# Altium PCB PCB_V1.PcbDoc
Units mm, origin at the board's own origin, x right, y up, seen from the top; angles counter-clockwise.
Board outline 31.91 x 15.3 mm, 2 copper layers (Top Layer, Bottom Layer), stack 1.58 mm thick; 21 components, 14 nets, 69 pads, 14 vias.
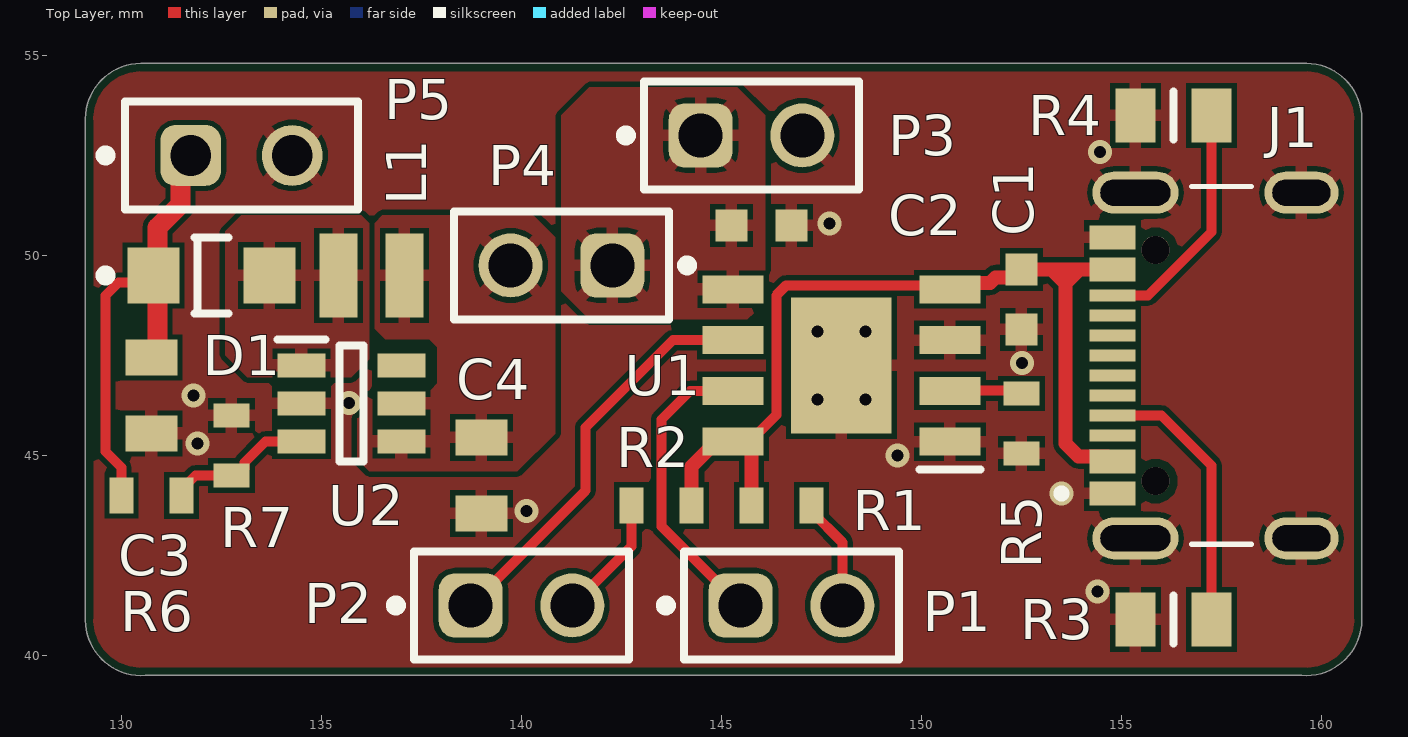
[diagram p0: Top Layer view]
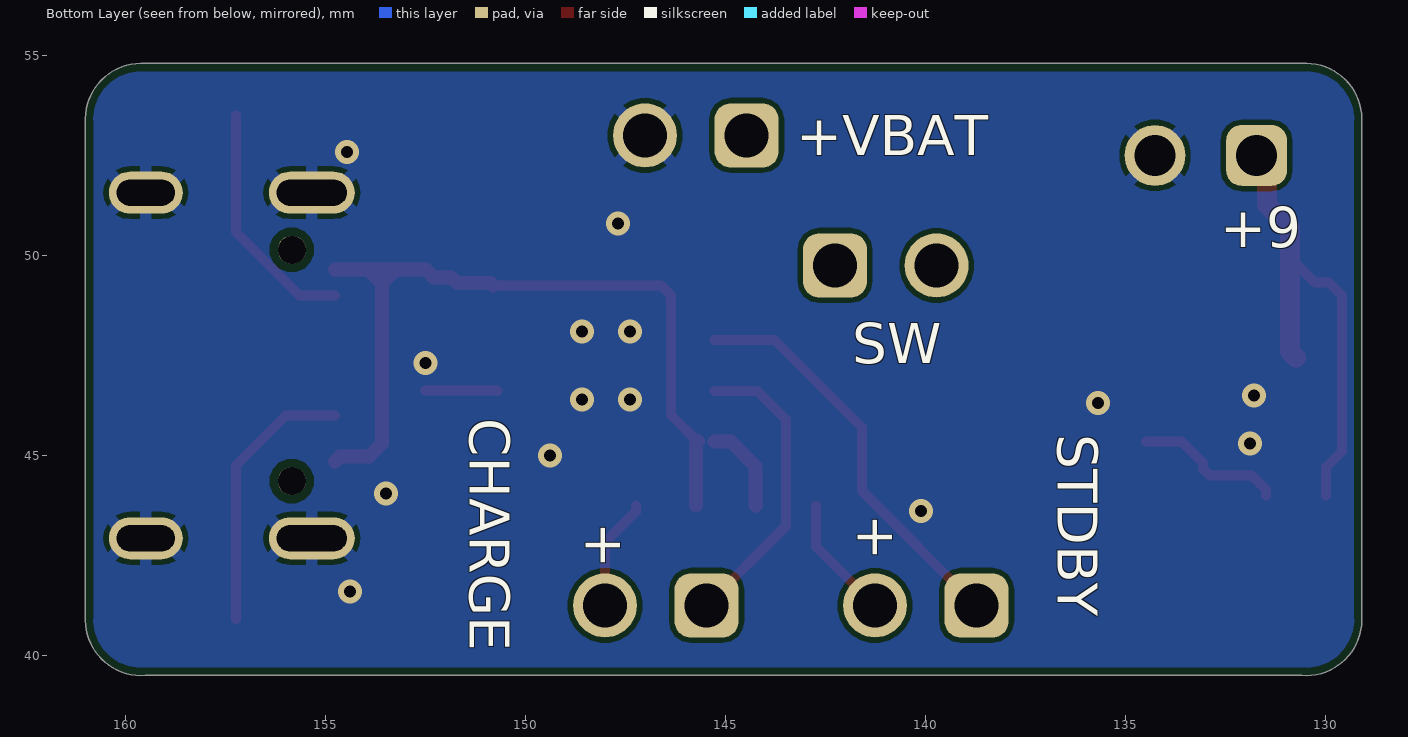
[diagram p1: Bottom Layer view, seen from below]
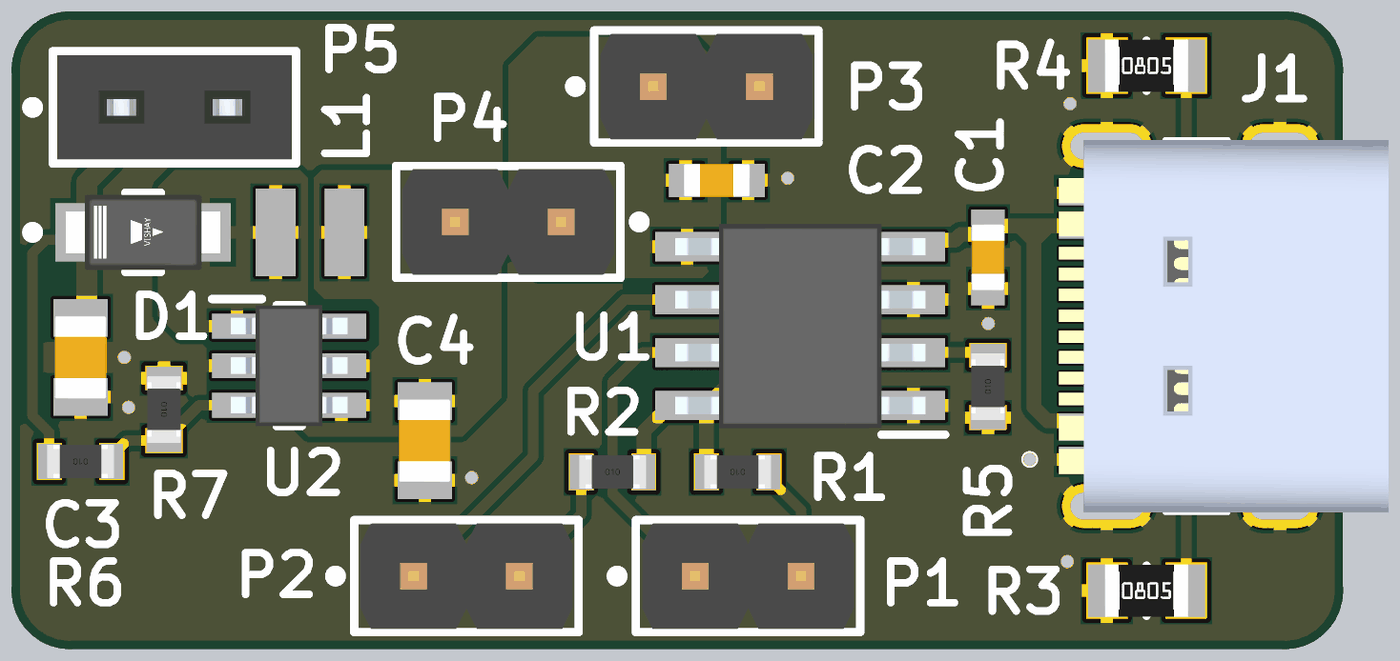
[diagram p2: 3D render of the assembled board from above, using the file's embedded part models]

## Layer stack, top to bottom
Top Solder: solder mask 0.01, Solder Resist, Dk 3.5
Top Layer: signal copper 0.035
Dielectric 1: dielectric 1.51, FR-4, Dk 4.5
Bottom Layer: signal copper 0.035
Bottom Solder: solder mask 0.01, Solder Resist, Dk 3.5

## Board outline
129.1,41 ccw(c130.5,40.9) 130.6,39.5 159.508,39.5 ccw(c159.608,40.9) 161.008,41 161.008,53.3 ccw(c159.608,53.4) 159.508,54.8 130.6,54.8 ccw(c130.5,53.4) 129.1,53.3

## Design rules (kind name [scope] priority, off if disabled: settings)
BoardOutlineClearance [All] p1: gap=0.2 ignorepadtopadclearanceinfootprint=FALSE
Clearance [All] p1: gap=0.127 ignorepadtopadclearanceinfootprint=FALSE except(0.2: Arc-Hole Track-Hole SMDPad-Hole THPad-Hole Via-Hole Fill-Hole Poly-Hole Region-Hole Text-Hole)
ComponentClearance [All] p1: gap=0.127 collisioncheckmode=3 verticalgap=0.127 showdistances=TRUE
DiffPairsRouting [All] p1: maxlimit=0.254 minlimit=0.127 mostfreqgap=0.127 toplayer_minwidth=0.127 toplayer_maxwidth=25.4 toplayer_prefwidth=0.127 bottomlayer_minwidth=0.127 bottomlayer_maxwidth=25.4 bottomlayer_prefwidth=0.127 maxuncoupledlength=12.7
Height [All] p1: minheight=0 maxheight=1816.048 prefheight=12.7
HoleSize [All] p1: absolutevalues=TRUE maxlimit=6.3 minlimit=0.15 maxpercent=80.000 minpercent=20.000
HoleToHoleClearance [All] p1: gap=0.25 allowstackedmicrovias=FALSE
MinimumAnnularRing [All] p1: minimumring=0.075
MinimumSolderMaskSliver [All] p1: minsoldermaskwidth=0
PlaneClearance [All] p1: clearance=0.127
PlaneConnect PlaneConnectPowerPads [InPadClass('PowerPads')] p1: planeconnectstyle=Direct reliefexpansion=0.508 reliefentries=4 reliefconductorwidth=0.254 reliefairgap=0.254
PlaneConnect [All] p2: pad.planeconnectstyle=Relief pad.reliefexpansion=0.3 pad.reliefentries=4 pad.reliefconductorwidth=0.127 pad.reliefairgap=0.127 via.planeconnectstyle=Direct via.reliefexpansion=0.3 via.reliefentries=4 via.reliefconductorwidth=0.127 via.reliefairgap=0.127
PolygonConnect PolygonConnectPowerPads [All vs (InPadClass('PowerPads'))] p1: connectstyle=Direct reliefconductorwidth=0.254 reliefentries=4 polygonreliefangle="90 Angle" airgapwidth=0.254
PolygonConnect [All] p2: thpad.connectstyle=Relief thpad.reliefconductorwidth=0.3 thpad.reliefentries=4 thpad.polygonreliefangle="90 Angle" thpad.airgapwidth=0.127 thpad.conductorbypadedge=TRUE thpad.mindistance=0.381 thpad.enablemindistance=FALSE smdpad.connectstyle=Relief smdpad.reliefconductorwidth=0.3 smdpad.reliefentries=4 smdpad.polygonreliefangle="90 Angle" smdpad.airgapwidth=0.127 smdpad.conductorbypadedge=TRUE smdpad.mindistance=0.381 smdpad.enablemindistance=FALSE via.connectstyle=Direct via.reliefconductorwidth=0.127 via.reliefentries=4 via.polygonreliefangle="90 Angle" via.airgapwidth=0.127
RoutingVias [All] p1: holewidth=0.3 width=0.6 viastyle="Through Hole" minholewidth=0.3 minwidth=0.6 maxholewidth=0.6 maxwidth=6.6
SilkToSilkClearance [All] p1: silktosilkclearance=0
SilkToSolderMaskClearance [IsPad] p1: minsilkscreentomaskgap=0.127 clearancetoexposedcopper=TRUE
SolderMaskExpansion SolderMaskExpansionVia [isVia] p1: expansion=0.102 istentingtop=TRUE
SolderMaskExpansion [All] p2: expansion=0.075 istentingtop=FALSE useseparateexpansions=TRUE expansionbottom=0.075 istentingbottom=FALSE
SupplyNets "Schematic Supply Nets_7" [InNet('+9')] p1: voltage=0.000
SupplyNets "Schematic Supply Nets_6" [InNet('+5')] p2: voltage=0.000
SupplyNets "Schematic Supply Nets_4" [InNet('GND')] p3: voltage=0.000
SupplyNets "Schematic Supply Nets_1" [InNet('VBAT')] p4: voltage=0.000
Width [All] p1: maxlimit=25.4 minlimit=0.127 preferedwidth=0.127 minimp=50.000000 maximp=50.000000 favimp=50.000000
20 further rules are at their usual default settings.

## Components (designator, comment, footprint, x,y, rotation, side; value= is the part's Value field where it differs from the comment)
C1 "Generic Capacitor 10uF 0603" "Wurth 0603 capacitor" 152.5,48.9 r90 top value=10uF
C2 "Generic Capacitor 10uF 0603" "Wurth 0603 capacitor" 146,50.75 r180 top value=10uF
C3 "Generic Capacitor 22uF 0805" "Wurth 0805 capacitor" 130.75,46.5 r90 top value=22uF
C4 "Generic Capacitor 22uF 0805" "Wurth 0805 capacitor" 139,44.5 r90 top value=22uF
D1 "V1FM10-M3/H" FP-V1FM10-M3-H-MFG 132.25,49.5 r180 top
J1 "KH-TYPE-C-16P" KINGHELM_KH-TYPE-C-16P 159.5,47.25 r90 top
L1 "FTC252010S4R7MBCA" "cjiang FTC252010S4R7MBCA" 136.25,49.5 r0 top value=4.7uH
P1 "61300211121" "2x1 2.54mm M" 146.75,41.25 r0 top
P2 "61300211121" "2x1 2.54mm M" 140,41.25 r0 top
P3 "61300211121" "2x1 2.54mm M" 145.75,53 r0 top
P4 "61300211121" "2x1 2.54mm M" 141,49.75 r180 top
P5 "61300211121" "2x1 2.54mm F" 133,52.5 r0 top
R1 "Generic Resistor 1k 0603" "Wurth 0603 Resistor" 146.5,43.75 r180 top value=1k
R2 "Generic Resistor 1k 0603" "Wurth 0603 Resistor" 143.5,43.75 r0 top value=1k
R3 "Generic Resistor 5k1 0805" "0805 Resistor" 156.3,40.9 r0 top value=5k1
R4 "Generic Resistor 5k1 0805" "0805 Resistor" 156.3,53.5 r0 top value=5k1
R5 "Generic Resistor 2k2 0603" "Wurth 0603 Resistor" 152.5,45.8 r90 top value=2k2
R6 "Generic Resistor 30k1 0603" "Wurth 0603 Resistor" 130.75,44 r180 top value=30k1
R7 "Generic Resistor 2k2 0603" "Wurth 0603 Resistor" 132.75,45.25 r270 top value=2k2
U1 "TP4056" SOIC127P600X175-9N 148,47.25 r180 top
U2 "MT3608" "Aerosemi SOT23-6" 135.75,46.3 r0 top

## Footprints (in the part's own frame and the unit in brackets; to place one, negate y for a bottom-side part, rotate by r counter-clockwise, add the part's x,y. Pads: shape width x height; smd on the part's side, far side on the other; paste and mask are expansions set on the pad)
"2x1 2.54mm F" [mm] "Socket Header, Pitch 2.54 mm, THT, Vertical, single row, 2p"
  rrect50% 1.52x1.52 hole 1.02: 1(-1.27,0)
  round 1.52 hole 1.02: 2(1.27,0)
  silkscreen extent -3.52,-1.35 2.92,1.35, body extent -2.79,-1.25 2.79,1.25, height 8.55
"2x1 2.54mm M" [mm] "Pin Header, pitch 2.54 mm, THT, Vertical, single row, 2p"
  rrect50% 1.6x1.6 hole 1.1: 1(-1.27,0)
  round 1.6 hole 1.1: 2(1.27,0)
  silkscreen extent -3.26,-1.35 2.69,1.35, body extent -2.54,-1.27 2.54,1.27, height 8.57
"0805 Resistor" [mm]
  rect 1x1.35 smd paste-0.045 mask+0.1: 1(-0.95,0) 2(0.95,0)
  silkscreen extent 0,-0.6 0,0.6, body extent -1,-0.63 1,0.63, height 0.52
"Aerosemi SOT23-6" [mm] "SOT23-6"
  rect 1.2x0.6 smd: 1(-1.25,0.95) 2(-1.25,0) 3(-1.25,-0.95) 4(1.25,-0.95) 5(1.25,0) 6(1.25,0.95)
  silkscreen extent -1.85,-1.45 0.3,1.6, body extent -1.4,-1.45 1.4,1.45, height 1.45
"cjiang FTC252010S4R7MBCA" [mm] "FTC252010S4R7MBCA"
  rect 0.95x2.1 smd: 1(-0.825,0) 2(0.825,0)
FP-V1FM10-M3-H-MFG [mm]
  rect 1.3x1.4 smd paste+0 mask+0: 1(1.45,0) 2(-1.45,0)
  silkscreen extent -0.43,-0.95 2.77,0.95, body extent -2.2,-1.05 2.2,1.05, height 0.25
KINGHELM_KH-TYPE-C-16P [mm]
  rect 0.6x1.15 smd mask+0.05: A1_B12(-3.2,4.725) A4_B9(-2.4,4.725) A9_B4(2.4,4.725) A12_B1(3.2,4.725)
  rect 0.3x1.15 smd mask+0.05: A5(-1.25,4.725) A6(-0.25,4.725) A7(0.25,4.725) A8(1.25,4.725) B5(1.75,4.725) B6(0.75,4.725) B7(-0.75,4.725) B8(-1.75,4.725)
  oval 1.05x1.85 hole 0.65 slot 1.45 at 90 deg mask+0.05: SH1(-4.32,0) SH2(4.32,0)
  oval 1.05x2.15 hole 0.65 slot 1.75 at 90 deg mask+0.05: SH3(-4.32,4.15) SH4(4.32,4.15)
  round 0.7 hole 0.7 unplated: ""(-2.89,3.65) ""(2.89,3.65)
  silkscreen extent -4.47,1.25 4.47,6.1, body extent -4.47,-2.6 4.47,5.3, height 3.22
SOIC127P600X175-9N [mm]
  rect 1.525x0.7 smd: 1(-2.712,1.905) 2(-2.712,0.635) 3(-2.712,-0.635) 4(-2.712,-1.905) 5(2.712,-1.905) 6(2.712,-0.635) 7(2.712,0.635) 8(2.712,1.905)
  rect 2.513x3.402 smd: 9(0,0)
  silkscreen extent -3.47,2.61 -1.95,2.61, body extent -3,-2.45 3,2.45, height 1.75
"Wurth 0603 capacitor" [mm] "Ceramic Capacitors, body 1.6x0.8mm"
  rect 0.8x0.8 smd: 1(-0.75,0) 2(0.75,0)
  body extent -0.8,-0.4 0.8,0.4, height 0.8
"Wurth 0603 Resistor" [mm] "Fixed Thick Film, body 1.60 x 0.80 mm"
  rect 0.6x0.9 smd paste-0.028 mask+0.1: 1(-0.75,0) 2(0.75,0)
  body extent -0.8,-0.4 0.8,0.4, height 0.45
"Wurth 0805 capacitor" [mm] "Ceramic Capacitors, body 2x1.25mm"
  rect 0.9x1.3 smd: 1(-0.95,0) 2(0.95,0)
  body extent -1,-0.63 1,0.63, height 1.25

## Part data
D1: library part CMP-02539-000045-1, "1A 100V SMF TRENCH SKY RECT", RoHS Compliant=Yes
J1: library part "Kinghelm KH-TYPE-C-16P", Package=None, Availability="Not in stock", Check_prices=https://www.snapeda.com/parts/KH-TYPE-C-16P/Ki/view-part/?ref=eda, MF=kinghelm, MP=KH-TYPE-C-16P, Price=None, SnapEDA_Link=https://www.snapeda.com/parts/KH-TYPE-C-16P/Ki/view-part/?ref=snap
L1: library part "2010 4.7µH  2A", "cjiang FTC252010S4R7MBCA"
P1 P2 P3 P4 P5: library part 2P, "WR-PHD Pin Header, THT, Vertical, pitch 2.54mm, 1 Row, 2P", Contact Resistance=20mOhm, Manufacturer="Wurth Elektronik", Operating Temperature Max=105°C, Operating Temperature Min=-40°C, Rated Current=3A, Withstanding Voltage=500V, Working Voltage=250V, Category="Board-to-Board Connectors", ComponentLink1Description="Website Link", ComponentLink1URL=https://www.we-online.com/redexpert/article/61300211121?ad, ComponentLink2Description="Datasheet Link", ComponentLink2URL=https://www.we-online.com/redexpert/spec/61300211121?ad, Gender="Pin Header", Manufacturer Part Number=61300211121, Match Code=WR-PHD, Mount="Through Hole", Number of Pins=2, Number of Rows=1, Orientation=Vertical, Packaging=Bag, Pitch=2.54mm
U1: "Lipo charger", Manufacturer_Name="NanJing Top Power", Datasheet Link=https://dlnmh9ip6v2uc.cloudfront.net/datasheets/Prototyping/TP4056.pdf, Height=1.75mm, Manufacturer_Part_Number=TP4056
U2: library part "Aerosemi MT3608", "Integrated Circuit", Manufacturer_Name=Aerosemi, Datasheet Link=https://www.olimex.com/Products/Breadboarding/BB-PWR-3608/resources/MT3608.pdf, Height=1.45mm, Manufacturer_Part_Number=MT3608

## Via types
v1: diameter 0.6, hole 0.3, Top Layer to Bottom Layer, tented both sides, 14 vias

## Nets (pads, with @x,y where several pads share a name; then routed paths per layer and width w, separated by ;. In a path a pad name is that pad's centre, name@x,y a point inside that pad or via, vN(x,y) a via of type N, cw(c..) or ccw(c..) an arc to the next point about the centre after c; other vN are vias at no path point)
+5: C1.2 J1.A4_B9 J1.A9_B4 R1.2 R2.2 U1.4 U1.8 | length 22.8
  Top Layer w0.25: U1.8@145.7,45.345 146.37,46.015 146.37,49.005 146.618,49.253 U1.4@150.81,49.253
  Top Layer w0.35: R2.2 144.256,43.755 144.256,44.725 144.876,45.345 U1.8 ; U1.8@145.7,45.345 145.75,45.295 R1.2 ; U1.4@150.81,49.253 150.868,49.311 151.711,49.311 151.854,49.454 152.304,49.454 C1.2 153.3,49.65 ; J1.A4_B9 154.65,44.975 153.925,44.975 153.6,45.3 153.6,49.3 ; J1.A9_B4 153.95,49.65 ; 153.3,49.65 153.95,49.65 ; 153.3,49.65 153.3,49.6 153.6,49.3 ; 153.6,49.3 153.95,49.65
+9: C3.2 D1.1 P5.1 R6.2 | length 12.4
  Top Layer w0.25: R6.2 130,44.7 129.6,45.1 129.6,49 129.921,49.321 130.275,49.321 D1.1@130.944,49.991
  Top Layer w0.5: C3.2 130.9,47.6 130.9,49.5 130.9,49.875 130.9,50.344 130.9,50.7 131.475,51.275 131.475,52.245 P5.1
GND: C1.1 C2.1 C3.1 C4.1 J1.A1_B12 J1.A12_B1 J1.SH1 J1.SH2 J1.SH3 J1.SH4 P3.2 P5.2 R3.1 R4.1 R5.1 R7.1 U1.1 U1.3 U1.9 U2.2
  other v1: 154.4,41.6 140.123,43.615 153.5,44.05 149.4,45 131.9,45.3 135.692,46.311 147.4,46.4 148.6,46.4 131.8,46.5 152.508,47.31 147.4,48.1 148.6,48.1 147.7,50.8 154.469,52.585
NetC4_2: C4.2 L1.2 P4.2 U2.4 U2.5
NetD1_2: D1.2 L1.1 U2.1
NetJ1_A5: J1.A5 R3.2 | length 6.8
  Top Layer w0.25: J1.A5 156,46 157.25,44.75 R3.2
NetJ1_B5: J1.B5 R4.2 | length 6
  Top Layer w0.25: J1.B5 155.665,49 157.25,50.585 R4.2
NetP1_1: P1.1 U1.7 | length 7.6
  Top Layer w0.25: U1.7 144.215,46.615 143.5,45.9 143.5,43.23 P1.1
NetP1_2: P1.2 R1.1 | length 2.8
  Top Layer w0.25: R1.1 147.25,43.6 148.02,42.83 P1.2
NetP2_1: P2.1 U1.6 | length 10.2
  Top Layer w0.25: P2.1 141.6,44.12 141.6,45.7 143.785,47.885 U1.6
NetP2_2: P2.2 R2.1 | length 3.1
  Top Layer w0.25: P2.2 142.75,42.73 R2.1
NetR5_2: R5.2 U1.2 | length 1.8
  Top Layer w0.25: U1.2 150.717,46.62 152.52,46.62 R5.2@152.525,46.624
NetR6_1: R6.1 R7.2 U2.3 | length 3.7
  Top Layer w0.25: R6.1 131.5,44.15 131.85,44.5 R7.2 132.9,44.5 133.075,44.675 133.075,44.825 133.6,45.35 U2.3
VBAT: C2.2 P3.1 P4.1 U1.5
pads on no net: J1. J1.A6 J1.A7 J1.A8 J1.B6 J1.B7 J1.B8 U2.6

## Polygon pours and split planes (outlines as drawn)
GND on Bottom Layer "NONET_L-01_P-001" (solid, pour order 0): 129.1,54.8 129.1,39.5 162.1,39.5 162.1,54.8
GND on Top Layer "NONET_L-01_P-001" (solid, pour order 6): 129.1,54.8 129.1,39.5 162.1,39.5 162.1,54.8
NetD1_2 on Top Layer "NONET_L-01_P-001" (solid, pour order 1): 133,51 132.6,50.6 132.6,47.5 133.15,46.95 135.75,46.95 136.2,47.4 136.2,50.8 136,51
NetC4_2 on Top Layer "NONET_L-01_P-001" (solid, pour order 2): 136.521,51 136.253,50.732 136.253,48.247 136.6,47.9 137.7,47.9 137.9,47.7 137.9,46.8 137.7,46.6 136.2,46.6 135.9,46.3 135.9,44.9 136.2,44.6 139.9,44.6 140.846,45.546 140.846,50.454 140.3,51
VBAT on Top Layer "NONET_L-01_P-001" (solid, pour order 4): 145.4,54.2 141.7,54.2 141,53.5 141,49.1 141.7,48.4 145.646,48.4 146.1,48.854 146.1,53.5

## Silkscreen, mask and mechanical layers (free items; w line width, h text height)
Bottom Overlay:
  text "+VBAT" at 143.233,52.5 h1
  text "+9" at 132.633,50.2 h1
  text "SW" at 141.833,47.3 h1
  text "CHARGE" at 151.4,45.932 h1 r90
  text "STDBY" at 136.7,45.533 h1 r90
  text "+" at 141.7,43.533 h1 r90
  text "+" at 148.5,43.333 h1 r90
Mechanical 1:
  the board outline again, w0.15